# Altium PCB K4B4G1646.pcbdoc
Units mil, origin at the board's own origin, x right, y up, seen from the top; angles counter-clockwise.
Board outline 4947.01 x 4947.01 mil, 2 copper layers (Top Layer, Bottom Layer); 1 components, 0 nets, 96 pads, 0 vias.
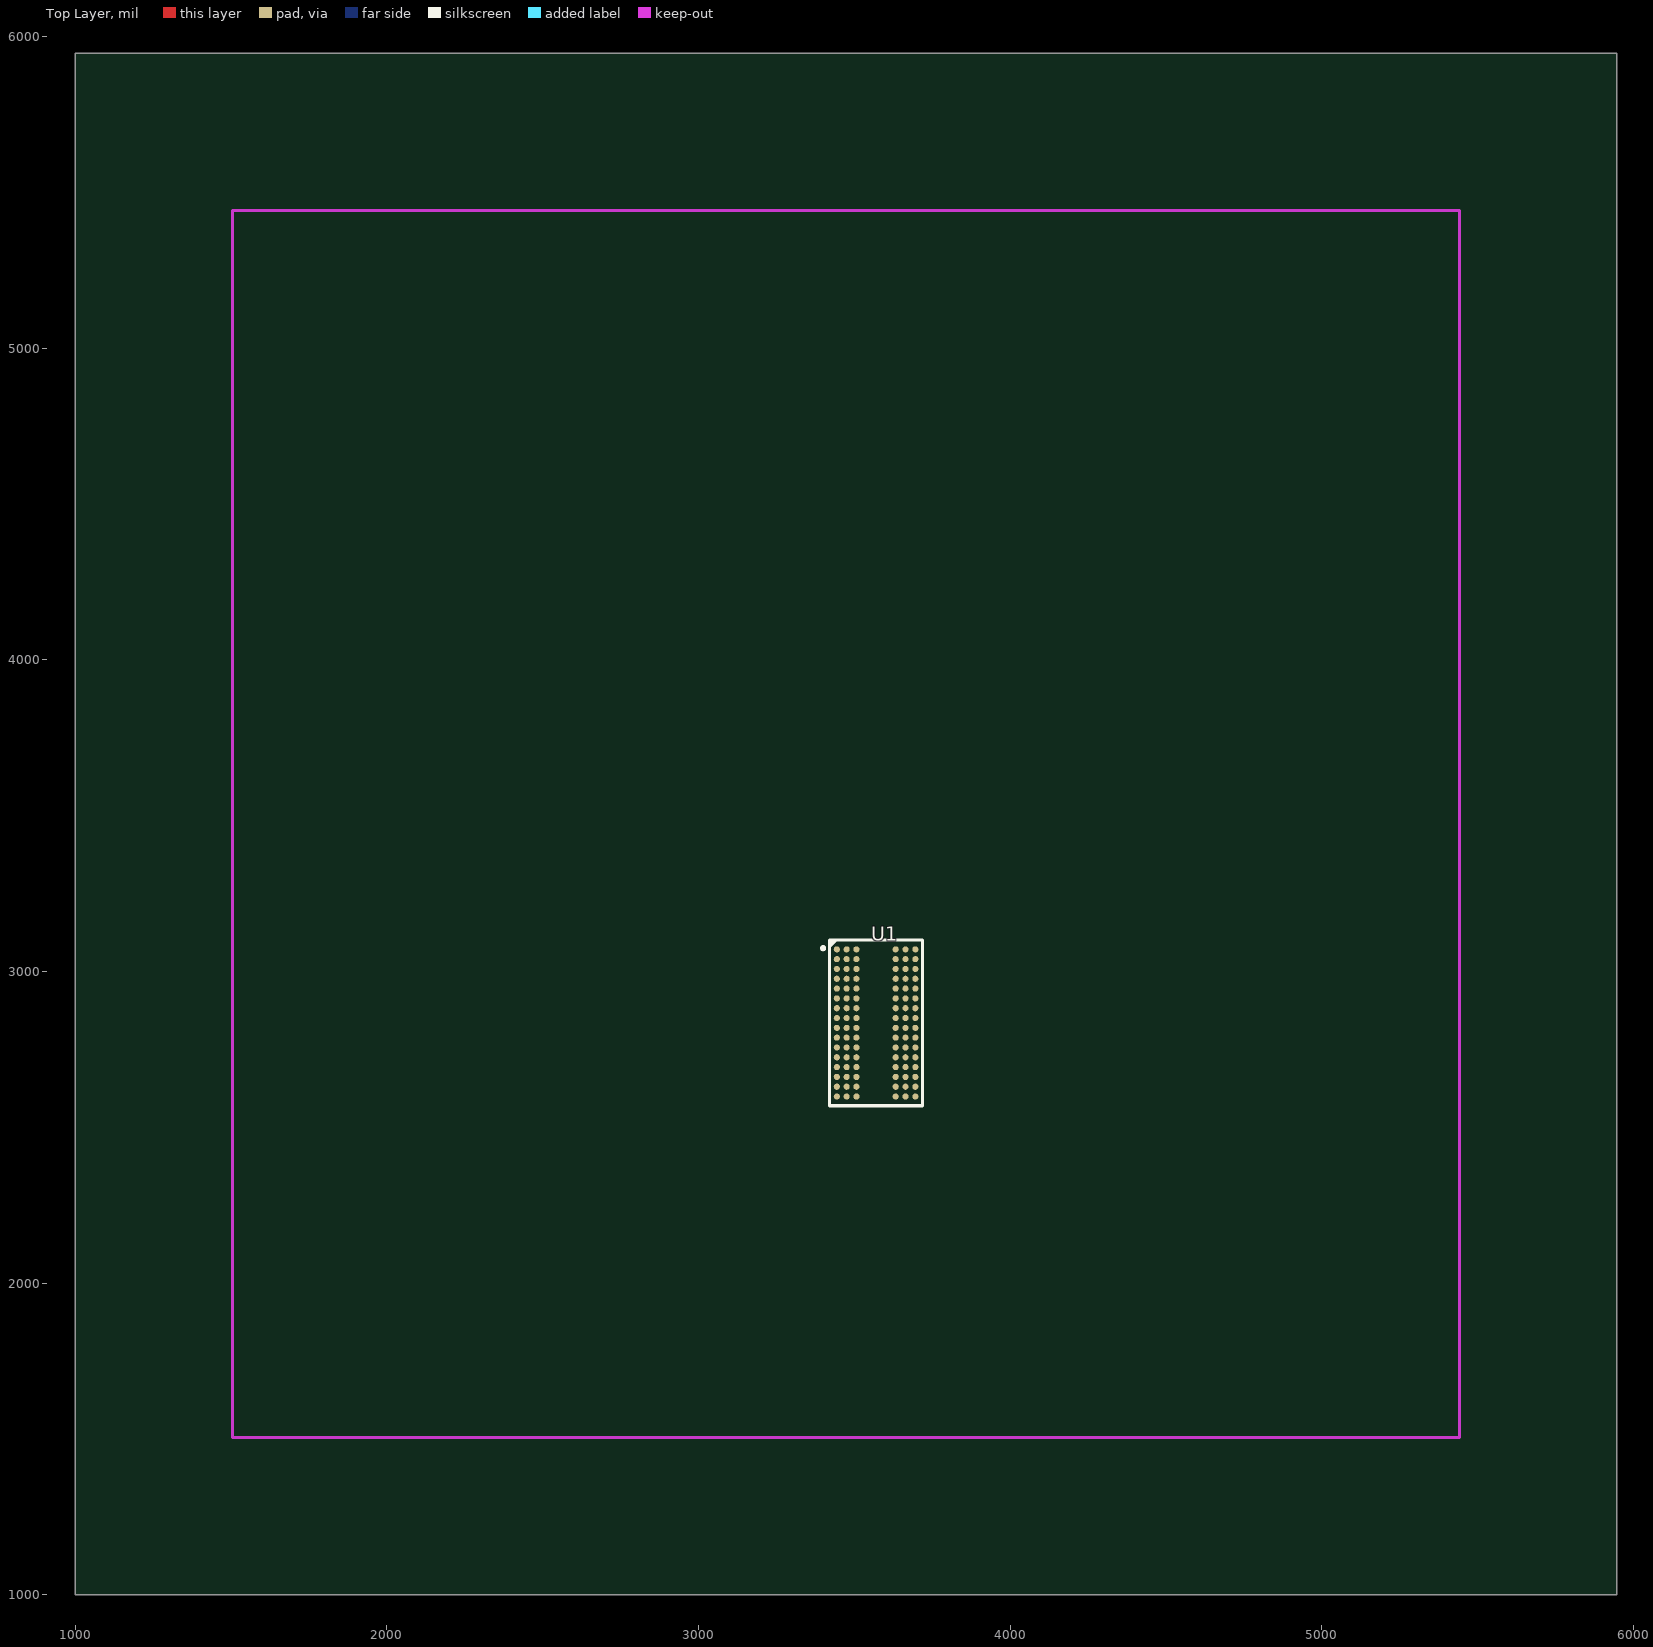
[diagram p0: Top Layer view]
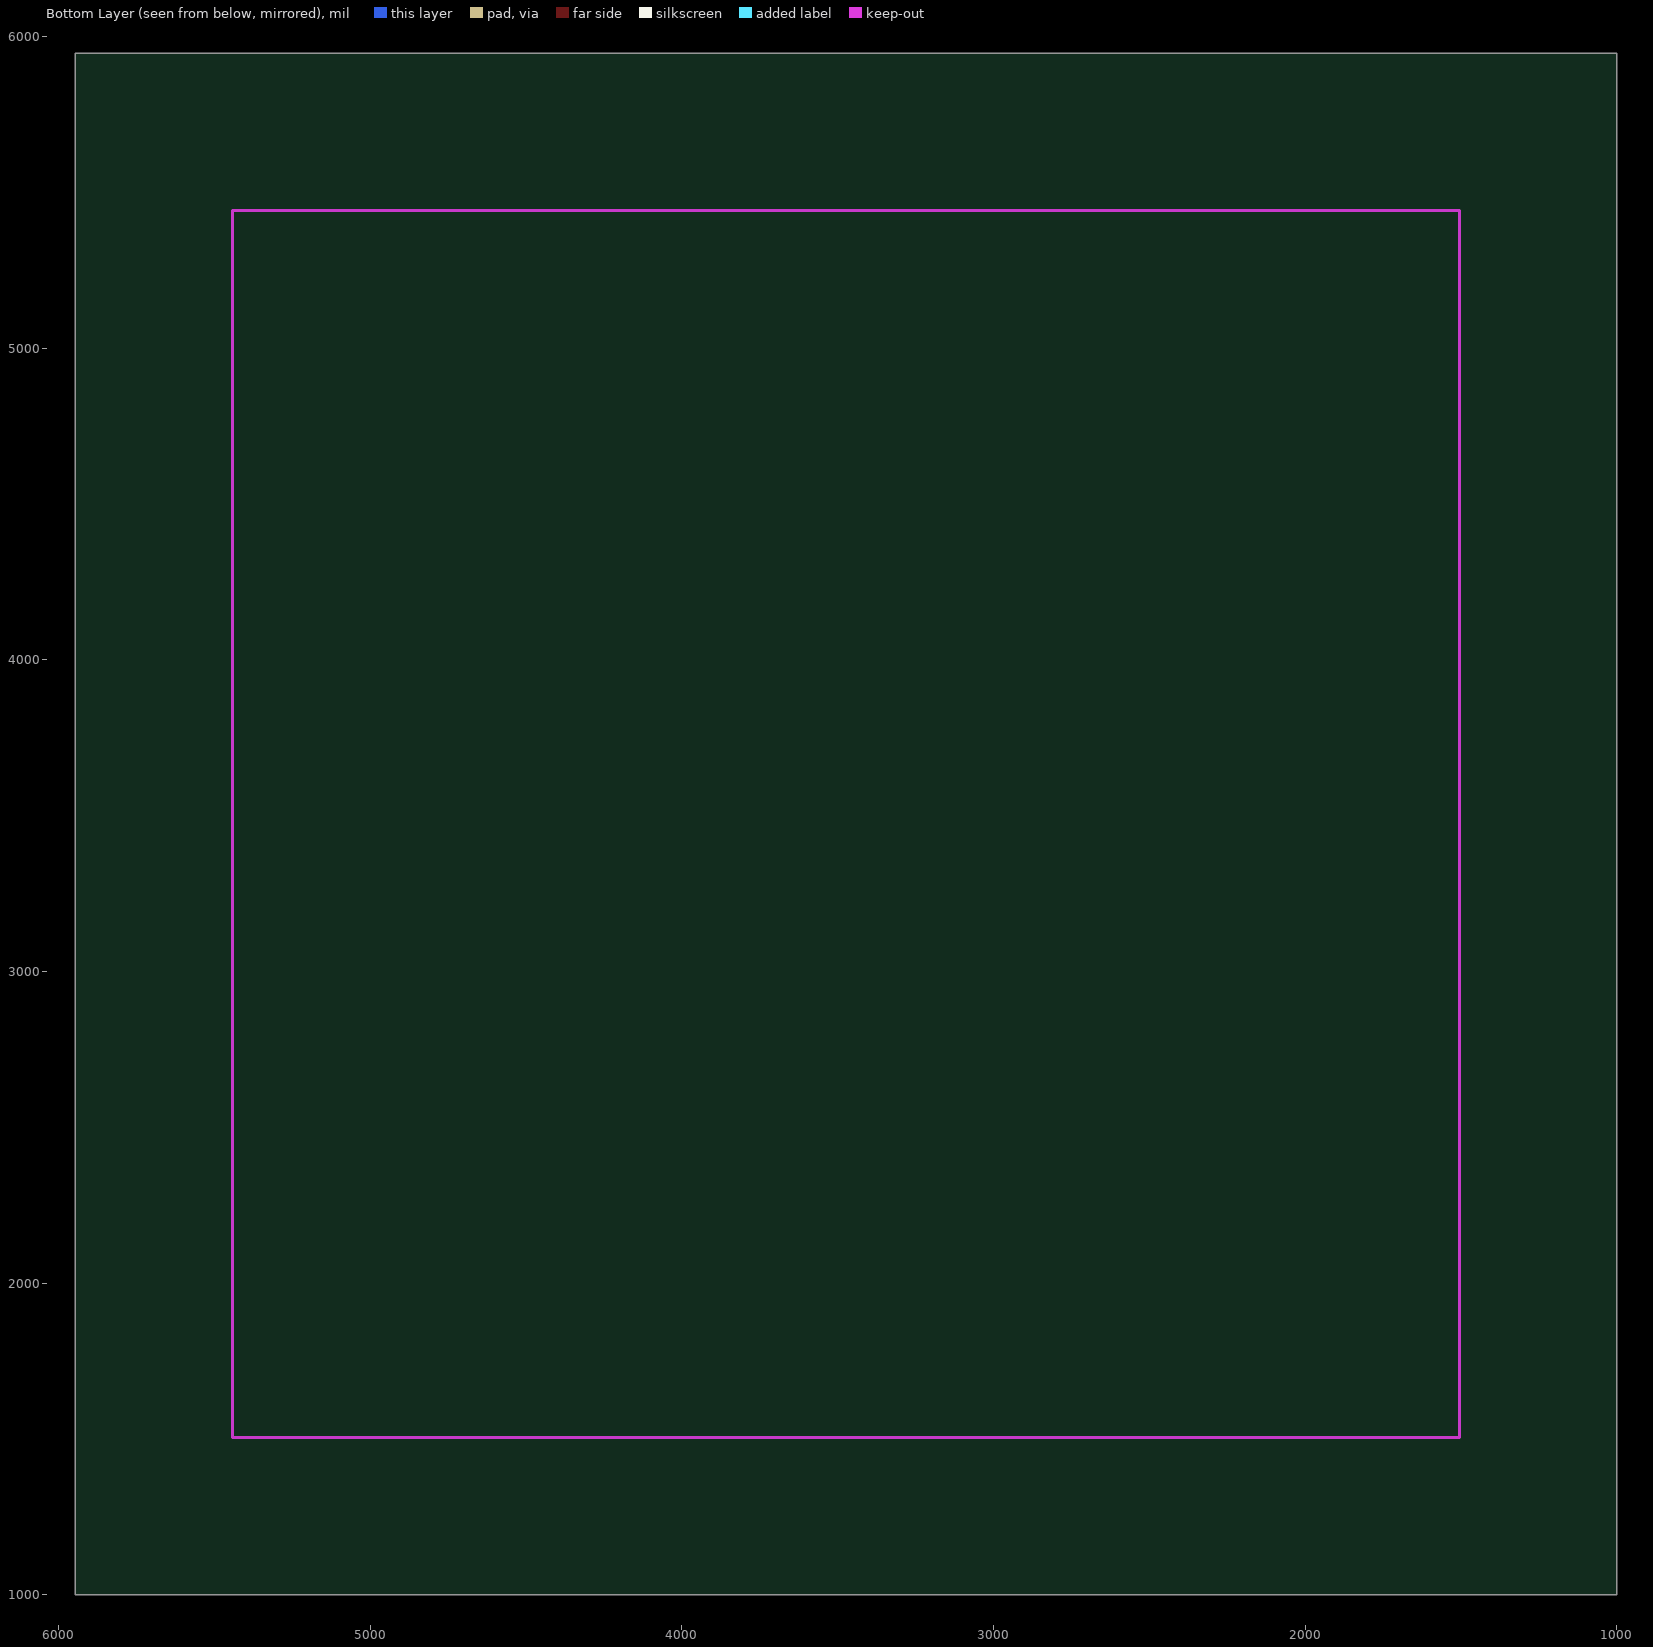
[diagram p1: Bottom Layer view, seen from below]

## Layer stack, top to bottom
Top Layer: signal copper (thickness not stored)
Dielectric: dielectric 12.6, FR-4, Dk 4.8
Bottom Layer: signal copper (thickness not stored)

## Board outline
5947.01,1000 1000,1000 1000,5947.01 5947.01,5947.01

## Components (designator, comment, footprint, x,y, rotation, side; value= is the part's Value field where it differs from the comment)
U1 "FBGA-96_L13.5-W7.5-R16-C6-P0.80-TL" FBGA-96_L13.5-W7.5-R16-C6-P0.80-TL 3570,2835 r0 top

## Footprints (in the part's own frame and the unit in brackets; to place one, negate y for a bottom-side part, rotate by r counter-clockwise, add the part's x,y. Pads: shape width x height; smd on the part's side, far side on the other; paste and mask are expansions set on the pad)
FBGA-96_L13.5-W7.5-R16-C6-P0.80-TL [mm]
  round 0.5 smd: A1(-3.2,6) A2(-2.4,6) A3(-1.6,6) A7(1.6,6) A8(2.4,6) A9(3.2,6) B1(-3.2,5.2) B2(-2.4,5.2) B3(-1.6,5.2) B7(1.6,5.2) B8(2.4,5.2) B9(3.2,5.2) C1(-3.2,4.4) C2(-2.4,4.4) C3(-1.6,4.4) C7(1.6,4.4) C8(2.4,4.4) C9(3.2,4.4) D1(-3.2,3.6) D2(-2.4,3.6) D3(-1.6,3.6) D7(1.6,3.6) D8(2.4,3.6) D9(3.2,3.6) E1(-3.2,2.8) E2(-2.4,2.8) E3(-1.6,2.8) E7(1.6,2.8) E8(2.4,2.8) E9(3.2,2.8) F1(-3.2,2) F2(-2.4,2) F3(-1.6,2) F7(1.6,2) F8(2.4,2) F9(3.2,2) G1(-3.2,1.2) G2(-2.4,1.2) G3(-1.6,1.2) G7(1.6,1.2) G8(2.4,1.2) G9(3.2,1.2) H1(-3.2,0.4) H2(-2.4,0.4) H3(-1.6,0.4) H7(1.6,0.4) H8(2.4,0.4) H9(3.2,0.4) J1(-3.2,-0.4) J2(-2.4,-0.4) J3(-1.6,-0.4) J7(1.6,-0.4) J8(2.4,-0.4) J9(3.2,-0.4) K1(-3.2,-1.2) K2(-2.4,-1.2) K3(-1.6,-1.2) K7(1.6,-1.2) K8(2.4,-1.2) K9(3.2,-1.2) L1(-3.2,-2) L2(-2.4,-2) L3(-1.6,-2) L7(1.6,-2) L8(2.4,-2) L9(3.2,-2) M1(-3.2,-2.8) M2(-2.4,-2.8) M3(-1.6,-2.8) M7(1.6,-2.8) M8(2.4,-2.8) M9(3.2,-2.8) N1(-3.2,-3.6) N2(-2.4,-3.6) N3(-1.6,-3.6) N7(1.6,-3.6) N8(2.4,-3.6) N9(3.2,-3.6) P1(-3.2,-4.4) P2(-2.4,-4.4) P3(-1.6,-4.4) P7(1.6,-4.4) P8(2.4,-4.4) P9(3.2,-4.4) R1(-3.2,-5.2) R2(-2.4,-5.2) R3(-1.6,-5.2) R7(1.6,-5.2) R8(2.4,-5.2) R9(3.2,-5.2) T1(-3.2,-6) T2(-2.4,-6) T3(-1.6,-6) T7(1.6,-6) T8(2.4,-6) T9(3.2,-6)
  silkscreen extent -4.44,-6.75 3.8,6.75

## Nets (pads, with @x,y where several pads share a name; then routed paths per layer and width w, separated by ;. In a path a pad name is that pad's centre, name@x,y a point inside that pad or via, vN(x,y) a via of type N, cw(c..) or ccw(c..) an arc to the next point about the centre after c; other vN are vias at no path point)
pads on no net: U1.A1 U1.A2 U1.A3 U1.A7 U1.A8 U1.A9 U1.B1 U1.B2 U1.B3 U1.B7 U1.B8 U1.B9 U1.C1 U1.C2 U1.C3 U1.C7 U1.C8 U1.C9 U1.D1 U1.D2 U1.D3 U1.D7 U1.D8 U1.D9 U1.E1 U1.E2 U1.E3 U1.E7 U1.E8 U1.E9 U1.F1 U1.F2 U1.F3 U1.F7 U1.F8 U1.F9 U1.G1 U1.G2 U1.G3 U1.G7 U1.G8 U1.G9 U1.H1 U1.H2 U1.H3 U1.H7 U1.H8 U1.H9 U1.J1 U1.J2 U1.J3 U1.J7 U1.J8 U1.J9 U1.K1 U1.K2 U1.K3 U1.K7 U1.K8 U1.K9 U1.L1 U1.L2 U1.L3 U1.L7 U1.L8 U1.L9 U1.M1 U1.M2 U1.M3 U1.M7 U1.M8 U1.M9 U1.N1 U1.N2 U1.N3 U1.N7 U1.N8 U1.N9 U1.P1 U1.P2 U1.P3 U1.P7 U1.P8 U1.P9 U1.R1 U1.R2 U1.R3 U1.R7 U1.R8 U1.R9 U1.T1 U1.T2 U1.T3 U1.T7 U1.T8 U1.T9